# Altium PCB Plata_Perehodnaya.PcbDoc
Units mm, origin at the board's own origin, x right, y up, seen from the top; angles counter-clockwise.
Board outline 25 x 55 mm, 2 copper layers (Top Layer, Bottom Layer); 13 components, 42 nets, 103 pads, 44 vias.
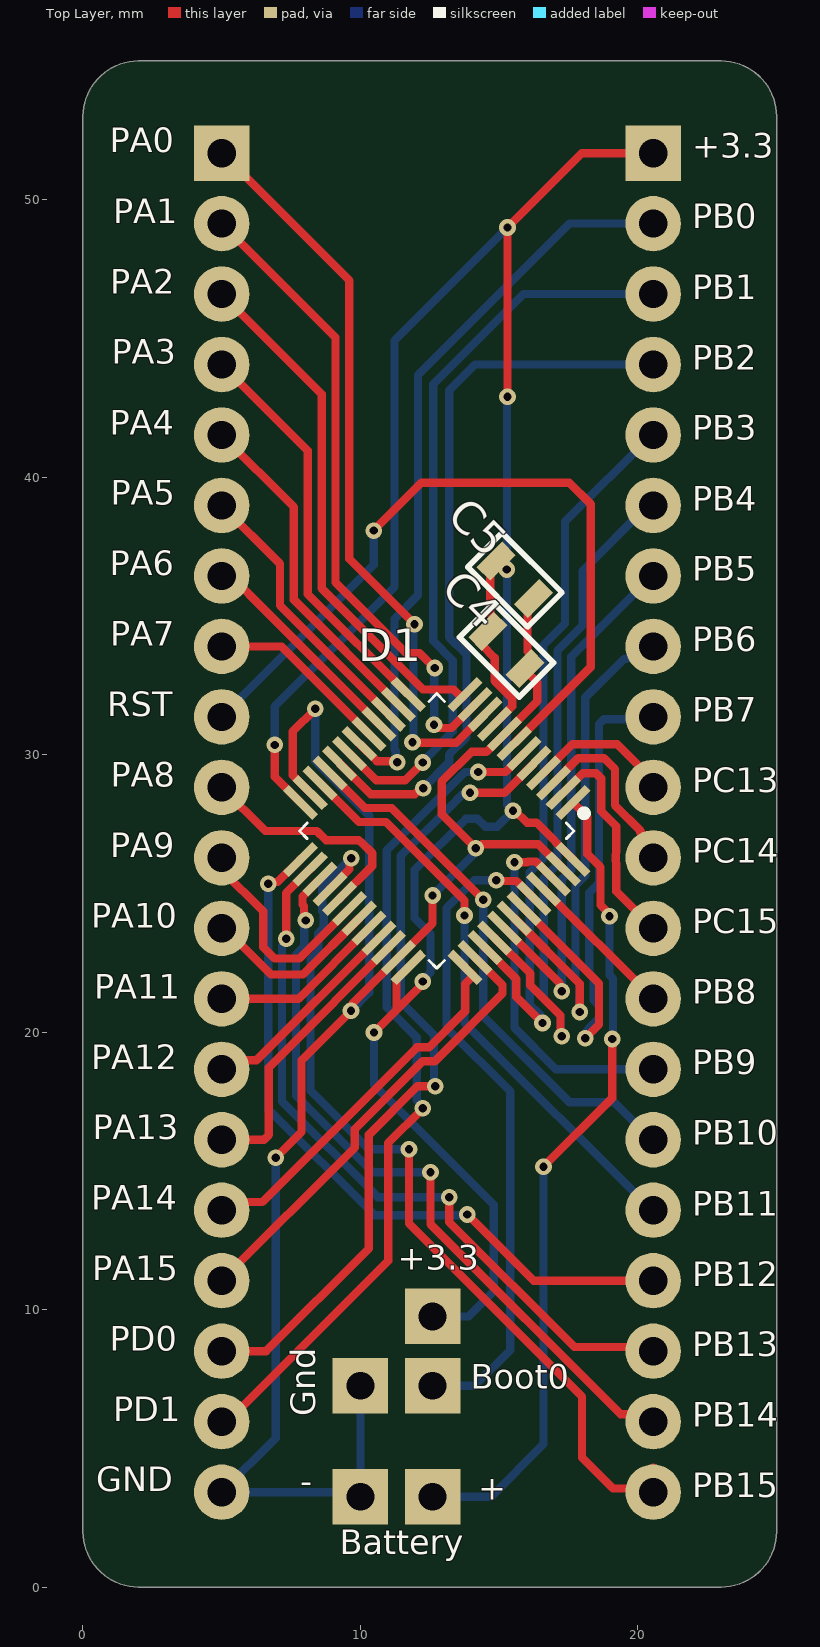
[diagram p0: Top Layer view]
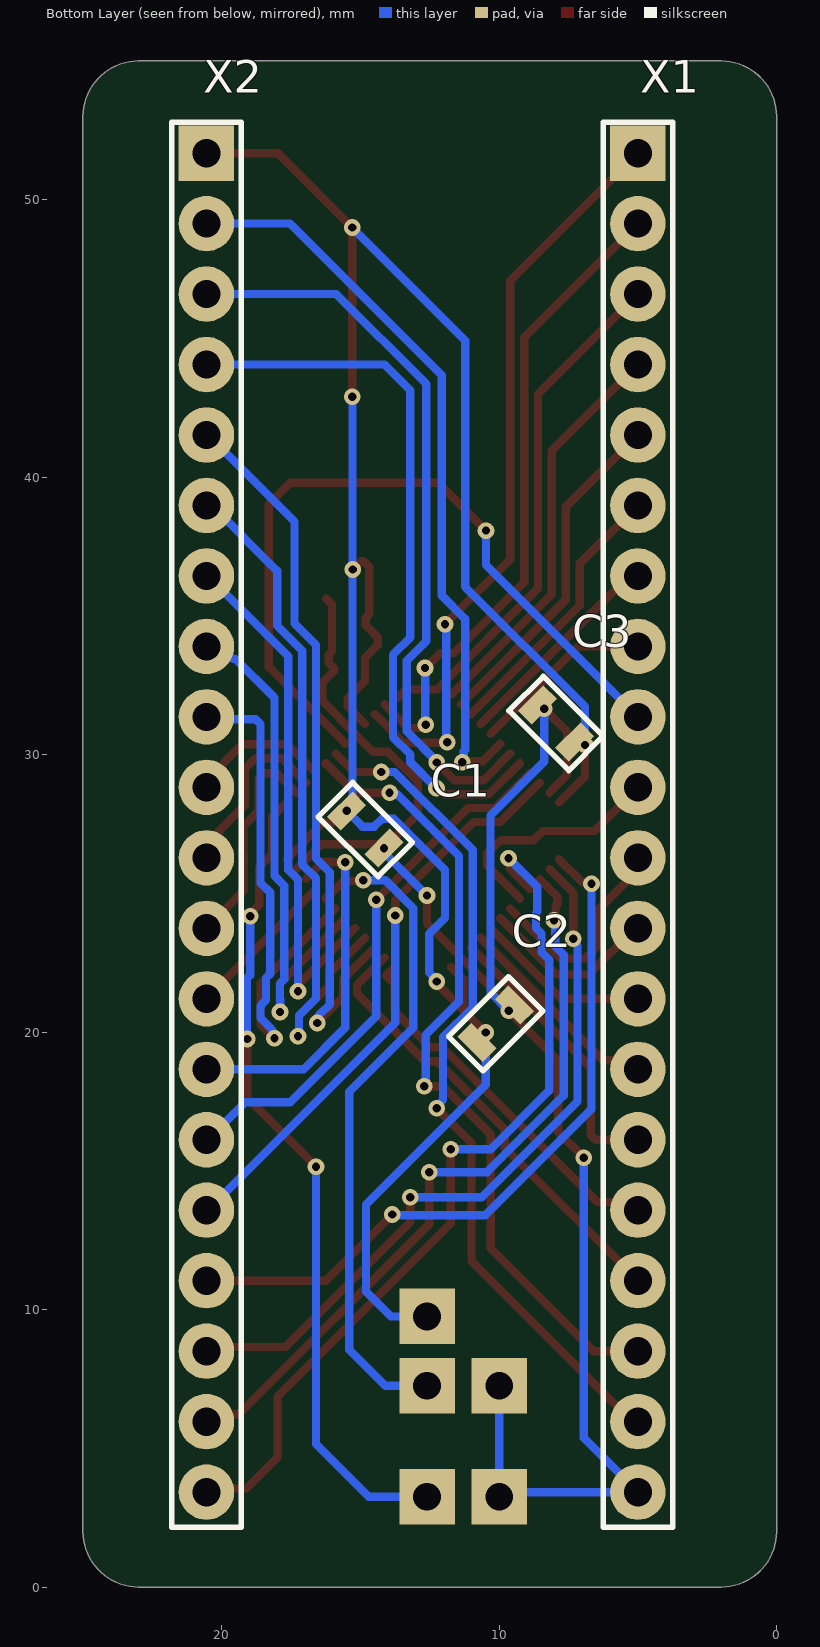
[diagram p1: Bottom Layer view, seen from below]

## Layer stack, top to bottom
Top Solder: solder mask 0.0102, Solder Resist, Dk 3.5
Top Layer: signal copper 0.0356
Dielectric 1: dielectric 0.32, FR-4, Dk 4.8
Bottom Layer: signal copper 0.0356
Bottom Solder: solder mask 0.0102, Solder Resist, Dk 3.5

## Board outline
0,2 0,53 cw(c2,53) 2,55 23,55 cw(c23,53) 25,53 25,2 cw(c23,2) 23,0 2,0 cw(c2,2)

## Design rules (kind name [scope] priority, off if disabled: settings)
Clearance [All] p1: gap=0.2 ignorepadtopadclearanceinfootprint=FALSE except(0: Arc-Hole Track-Hole SMDPad-Hole THPad-Hole Via-Hole Fill-Hole Poly-Hole Region-Hole Text-Hole)
PolygonConnect [All] p1: connectstyle=Relief reliefconductorwidth=0.254 reliefentries=4 polygonreliefangle="90 Angle" airgapwidth=0.254
RoutingVias [All] p1: holewidth=0.3 width=0.6 viastyle="Through Hole" minholewidth=0.3 minwidth=0.6 maxholewidth=1 maxwidth=2
SolderMaskExpansion [All] p1: expansion=0.102 istentingtop=FALSE
Width [All] p1: maxlimit=1 minlimit=0.3 preferedwidth=0.5
30 further rules are at their usual default settings.

## Classes and differential pairs
component class Plata_Perehodnaya: + Boot0 C1 C2 C3 C4 C5 D1 Gnd S X1 X2

## Components (designator, comment, footprint, x,y, rotation, side; value= is the part's Value field where it differs from the comment)
+ "Стыковка" Стыковка#1 13.056,2.65 r0 top (schematic designator X5)
+3.3 "Стыковка" Стыковка#2 12.6,9.665 r0 top (schematic designator X7)
- "Стыковка" Стыковка#3 9.5,2.65 r0 top (schematic designator X6)
Boot0 "Стыковка" Стыковка#4 12.6,7.207 r0 top (schematic designator X8)
C1 "0,1 мкФ" C0805 14.825,27.3 r225 bottom
C2 "0,1 мкФ" C0805 10.125,20.3 r135 bottom
C3 "0,1 мкФ" C0805 7.95,31.125 r45 bottom
C4 "0,1 мкФ" C0805 15.263,33.771 r315 top
C5 "10 нФ" C0805 15.563,36.3 r315 top
D1 "STM32F103C8" "48-LQFP (7x7)" 12.75,27.25 r225 top
Gnd "Стыковка" Стыковка#5 10.1,7.15 r0 top (schematic designator X9)
X1 "" "PLS-20 (DS-1021-1x20)" 5,40.25 r180 bottom
X2 "" "PLS-20 (DS-1021-1x20)" 20.55,40.25 r180 bottom

## Footprints (in the part's own frame and the unit in brackets; to place one, negate y for a bottom-side part, rotate by r counter-clockwise, add the part's x,y. Pads: shape width x height; smd on the part's side, far side on the other; paste and mask are expansions set on the pad)
"48-LQFP (7x7)" [mm] "TSQFP, 48-Leads, Body 7,00x7,00mm, Pitch 0,50mm, Thermal Pad 5,50x5,50mm, IPC Medium Density"
  rect 1.5x0.3 smd: 1(-4.2,2.75) 2(-4.2,2.25) 3(-4.2,1.75) 4(-4.2,1.25) 5(-4.2,0.75) 6(-4.2,0.25) 7(-4.2,-0.25) 8(-4.2,-0.75) 9(-4.2,-1.25) 10(-4.2,-1.75) 11(-4.2,-2.25) 12(-4.2,-2.75) 25(4.2,-2.75) 26(4.2,-2.25) 27(4.2,-1.75) 28(4.2,-1.25) 29(4.2,-0.75) 30(4.2,-0.25) 31(4.2,0.25) 32(4.2,0.75) 33(4.2,1.25) 34(4.2,1.75) 35(4.2,2.25) 36(4.2,2.75)
  rect 0.3x1.5 smd: 13(-2.75,-4.2) 14(-2.25,-4.2) 15(-1.75,-4.2) 16(-1.25,-4.2) 17(-0.75,-4.2) 18(-0.25,-4.2) 19(0.25,-4.2) 20(0.75,-4.2) 21(1.25,-4.2) 22(1.75,-4.2) 23(2.25,-4.2) 24(2.75,-4.2) 37(2.75,4.2) 38(2.25,4.2) 39(1.75,4.2) 40(1.25,4.2) 41(0.75,4.2) 42(0.25,4.2) 43(-0.25,4.2) 44(-0.75,4.2) 45(-1.25,4.2) 46(-1.75,4.2) 47(-2.25,4.2) 48(-2.75,4.2)
  silkscreen extent -4.32,-3.5 3.5,3.5, body extent -4.5,-4.5 4.5,4.5, height 1.6
C0805 [mm]
  rect 0.7x1.3 smd: 1(-0.95,0) 2(0.95,0)
  silkscreen extent -1.53,-0.87 1.53,0.87, body extent -1,-0.63 1,0.63, height 0.6
"PLS-20 (DS-1021-1x20)" [mm]
  rect 2x2 hole 1.02: 1(0,11.43)
  round 2 hole 1.02: 2(0,8.89) 3(0,6.35) 4(0,3.81) 5(0,1.27) 6(0,-1.27) 7(0,-3.81) 8(0,-6.35) 9(0,-8.89) 10(0,-11.43) 11(0,-13.97) 12(0,-16.51) 13(0,-19.05) 14(0,-21.59) 15(0,-24.13) 16(0,-26.67) 17(0,-29.21) 18(0,-31.75) 19(0,-34.29) 20(0,-36.83)
  silkscreen extent -1.25,-38.1 1.25,12.53, body extent -1.27,-38.1 1.27,12.7, height 9.2
Стыковка#1 [mm]
  rect 2x2 hole 1: 1(-0.456,0.6)
Стыковка#2 [mm]
  rect 2x2 hole 1: 1(0,0.085)
Стыковка#3 [mm]
  rect 2x2 hole 1: 1(0.5,0.6)
Стыковка#4 [mm]
  rect 2x2 hole 1: 1(0,0.043)
Стыковка#5 [mm]
  rect 2x2 hole 1: 1(-0.1,0.1)

## Part data
C1 C2 C3 C4: library part Capacity, "0.1 µF ±10% 50V Ceramic Capacitor X7R 0805 (2012 Metric)", Case=0805, Manufacture="Murata Electronics", Model=GRM21BR71H104KA01L, Name=Конденсатор
  C1 C2 C3: HelpURL=https://www.digikey.com/en/products/detail/murata-electronics/GRM21BR71H104KA01L/586718?s=N4IgTCBcDaIOICUCyYCMAhBB2VAJVADACwDSAggagDYgC6AvkA
  C4: HelpURL=N4IgTCBcDaIOICUCyYCMAhBB2VAJVADACwDSAggagDYgC6AvkA
C5: library part Capacity, "±5% 50V Ceramic Capacitor X7R 0805 (2012 Metric)", Case=0805, Manufacture=Yageo, HelpURL=https://www.digikey.com/en/products/detail/yageo/CS0805JRX7R9BB103/6097936, Model=CS0805JRX7R9BB103, Name=Конденсатор
D1: library part STM32F103C8T6, Case=48-LQFP, Manufacture=STMicroelectronics, HelpURL=https://www.digikey.com/product-detail/en/stmicroelectronics/STM32F103C8T7TR/STM32F103C8T7TR-ND/5268214, Model=STM32F103C8T, Name=Микроконтроллер
X1 X2: library part "Разъемы на плате-20", Name=Разъем

## Via types
v1: diameter 0.6, hole 0.3, Top Layer to Bottom Layer, 44 vias

## Nets (pads, with @x,y where several pads share a name; then routed paths per layer and width w, separated by ;. In a path a pad name is that pad's centre, name@x,y a point inside that pad or via, vN(x,y) a via of type N, cw(c..) or ccw(c..) an arc to the next point about the centre after c; other vN are vias at no path point)
+3.3: +3.3.1 C1.1 C2.1 C3.1 C4.1 C5.1 D1.9 D1.24 D1.36 D1.48 X2.1 | length 89.4
  Top Layer w0.3: v1(6.906,30.35) 6.906,29.205 D1.24 ; v1(10.488,19.987) 11.3,20.8 ; D1.36 11.3,21.911 11.3,20.8 ; v1(12.25,21.825) 12.25,21.749 11.3,20.8 ; D1.9 15.469,31.737 15.469,32.027 14.836,32.659 14.836,33.491 14.379,33.947 14.379,34.23 C4.1 14.804,34.655 14.804,34.937 14.679,35.062 14.679,36.76 C5.1 14.978,36.972 v1(15.275,36.675) ; v1(15.3,42.9) v1(15.3,49) 17.98,51.68 X2.1 ; v1(15.497,27.972) 15.578,27.972 16.004,27.546 16.343,27.546 D1.48
  Bottom Layer w0.3: v1(6.906,30.35) 6.906,31.731 11.225,36.05 11.225,44.925 v1(15.3,49) ; v1(10.488,19.987) 10.488,19.416 10.488,18.093 12.631,15.95 14.8,13.781 14.8,10.65 13.9,9.75 +3.3.1 ; v1(12.25,21.825) 12.25,21.876 12.525,22.151 12.525,23.541 11.95,24.116 11.95,25.839 13.796,27.685 14.224,27.685 14.503,27.406 14.931,27.406 v1(15.497,27.972) 15.285,28.184 15.285,42.885 v1(15.3,42.9)
BOOT0: Boot0.1 D1.44 | length 24.1
  Top Layer w0.3: v1(14.9,25.475) 14.932,25.443 15.617,25.443 D1.44
  Bottom Layer w0.3: Boot0.1 14.1,7.25 15.4,8.55 15.4,17.853 13.1,20.153 13.1,24.469 14.106,25.475 v1(14.9,25.475)
GND: -.1 C1.2 C2.2 C3.2 C4.2 C5.2 D1.8 D1.23 D1.35 D1.47 Gnd.1 X1.20 | length 66.9
  Top Layer w0.3: v1(6.95,15.475) 7.875,16.4 7.875,18.981 v1(9.66,20.765) 9.717,20.823 9.717,21.035 D1.35 12.6,23.918 v1(12.6,24.925) ; D1.23 7.556,29.262 7.556,30.831 v1(8.375,31.65) ; C5.2 16.023,35.416 16.023,33.718 16.147,33.594 16.147,33.311 C4.2 15.935,33.04 16.375,32.6 16.375,31.936 D1.8 14.539,30.1 14,30.1 12.925,29.025 12.925,27.856 v1(14.153,26.628) 14.234,26.628 14.381,26.775 16.407,26.775 D1.47
  Bottom Layer w0.3: v1(6.95,15.475) 6.95,5.37 X1.20 9.83,3.42 -.1 Gnd.1 ; v1(8.375,31.65) 8.375,29.753 10.316,27.812 10.316,21.422 v1(9.66,20.765) ; v1(12.6,24.925) 14.153,26.478 v1(14.153,26.628)
NetD1_2: D1.2 X2.12 | length 7.9
  Top Layer w0.3: D1.2 18.007,29.325 18.499,29.325 18.587,29.237 18.675,29.149 18.675,27.968 19.225,27.418 19.225,26.539 ccw(c20.55,26.28) 19.225,26.021 19.225,25.065 X2.12
NetD1_3: D1.3 X2.11 | length 6.5
  Top Layer w0.3: D1.3 17.85,29.875 18.775,29.875 19.175,29.475 19.175,28.175 20.085,27.265 20.085,27.205 20.5,26.79 X2.11@20.5,26.28
NetD1_4: D1.4 X2.10 | length 5.1
  Top Layer w0.3: D1.4 17.643,30.375 19.25,30.375 20.5,29.125 X2.10@20.5,28.82
NetD1_5: D1.5 X1.18 | length 29.1
  Top Layer w0.3: X1.18 6.6,8.5 10.3,12.2 10.3,16.3 12.05,18.05 v1(12.7,18.05) ; v1(13.95,28.625) 15.186,28.625 D1.5
  Bottom Layer w0.3: v1(12.7,18.05) 12.65,18.1 12.65,19.896 11.45,21.096 11.45,26.349 13.202,28.1 13.669,28.568 13.893,28.568 v1(13.95,28.625)
NetD1_6: D1.6 X1.19 | length 30.7
  Top Layer w0.3: X1.19 5.21,5.96 11,11.75 11,16 v1(12.25,17.25) ; v1(14.25,29.375) 15.229,29.375 D1.6
  Bottom Layer w0.3: v1(12.25,17.25) 12.25,17.331 12.025,17.556 12.025,19.814 10.95,20.889 10.95,26.556 13.769,29.375 v1(14.25,29.375)
NetD1_7: D1.7 X1.9 | length 27.6
  Top Layer w0.3: v1(10.475,38.075) 12.2,39.8 17.525,39.8 18.3,39.025 18.3,33.154 D1.7
  Bottom Layer w0.3: X1.9 10.475,36.835 v1(10.475,38.075)
NetD1_10: D1.10 X1.1 | length 27.2
  Top Layer w0.3: X1.1 5.85,50.83 9.6,47.08 9.6,37.05 v1(11.95,34.7) ; v1(11.875,30.45) 11.9,30.425 13.45,30.425 D1.10
  Bottom Layer w0.3: v1(11.875,30.45) 11.913,30.488 11.913,34.663 v1(11.95,34.7)
NetD1_11: D1.11 X1.2 | length 23.4
  Top Layer w0.3: X1.2 9.1,45.04 9.1,36.203 11.653,33.65 12.14,33.65 12.665,33.125 v1(12.675,33.125) ; v1(12.65,31.075) 12.731,31.075 12.844,30.962 13.28,30.962 D1.11
  Bottom Layer w0.3: v1(12.65,31.075) 12.663,31.088 12.663,33.112 v1(12.675,33.125)
NetD1_12: D1.12 X1.3 | length 19
  Top Layer w0.3: X1.3 8.6,43 8.6,35.996 12.246,32.35 13.361,32.35 13.661,32.05 D1.12
NetD1_13: D1.13 X1.4 | length 14.7
  Top Layer w0.3: X1.4 8.1,40.96 8.1,35.789 D1.13
NetD1_14: D1.14 X1.5 | length 12.3
  Top Layer w0.3: X1.5 7.6,38.92 7.6,35.582 D1.14
NetD1_15: D1.15 X1.6 | length 10
  Top Layer w0.3: X1.6 7.1,36.88 7.1,35.375 D1.15
NetD1_16: D1.16 X1.7 | length 7.9
  Top Layer w0.3: X1.7 5.328,36.44 6.6,35.168 D1.16
NetD1_17: D1.17 X1.8 | length 6.6
  Top Layer w0.3: X1.8 7.161,33.9 D1.17
NetD1_18: D1.18 X2.2 | length 26.7
  Top Layer w0.3: D1.18 10.59,29.764 11.286,29.764 v1(11.325,29.725)
  Bottom Layer w0.3: v1(11.325,29.725) 11.273,29.777 11.273,30.133 11.225,30.181 11.225,34.894 12.075,35.744 12.075,43.675 17.54,49.14 X2.2@20.5,49.14
NetD1_19: D1.19 X2.3 | length 26.9
  Top Layer w0.3: D1.19 10.571,29.075 11.61,29.075 v1(12.25,29.715)
  Bottom Layer w0.3: v1(12.25,29.715) 12.25,29.756 13.325,30.831 13.325,33.394 12.625,34.095 12.625,43.35 15.875,46.6 X2.3@20.5,46.6
NetD1_20: D1.20 X2.4 | length 26.5
  Top Layer w0.3: D1.20 10.364,28.575 11.969,28.575 12.178,28.785 v1(12.26,28.785)
  Bottom Layer w0.3: v1(12.26,28.785) 13.2,29.725 13.2,29.999 13.825,30.624 13.825,33.601 13.2,34.227 13.2,43.125 14.135,44.06 X2.4@20.5,44.06
NetD1_21: D1.21 X2.15 | length 19.5
  Top Layer w0.3: D1.21 10.157,28.075 11.125,28.075 v1(14.425,24.775)
  Bottom Layer w0.3: v1(14.425,24.775) 14.425,20.575 17.525,17.475 19.145,17.475 X2.15@20.5,16.12
NetD1_22: D1.22 X2.16 | length 20.9
  Top Layer w0.3: D1.22 9.775,27.75 9.95,27.575 10.918,27.575 13.75,24.743 v1(13.75,24.2)
  Bottom Layer w0.3: v1(13.75,24.2) 13.75,20.33 X2.16@20.5,13.58
NetD1_25: D1.25 X2.17 | length 26.1
  Top Layer w0.3: v1(6.675,25.35) 6.732,25.407 7.018,25.407 D1.25 ; v1(13.85,13.425) 16.235,11.04 X2.17
  Bottom Layer w0.3: v1(6.675,25.35) 6.675,17.225 10.5,13.4 13.825,13.4 v1(13.85,13.425)
NetD1_26: D1.26 X2.18 | length 26.4
  Top Layer w0.3: v1(7.325,23.363) 7.325,25.007 D1.26 ; v1(13.2,14.05) 13.2,13.156 17.707,8.649 20.401,8.649 X2.18
  Bottom Layer w0.3: v1(7.325,23.363) 7.325,23.281 7.175,23.131 7.175,17.5 10.625,14.05 v1(13.2,14.05)
NetD1_27: D1.27 X2.19 | length 27.1
  Top Layer w0.3: v1(8.025,24.025) 7.968,24.082 7.968,24.537 7.91,24.595 7.91,24.885 D1.27 ; v1(12.525,14.95) 12.525,13.075 19.37,6.23 20.28,6.23 X2.19
  Bottom Layer w0.3: v1(8.025,24.025) 7.975,23.975 7.975,23.093 7.675,22.793 7.675,17.707 10.432,14.95 v1(12.525,14.95)
NetD1_28: D1.28 X2.20 | length 32.5
  Top Layer w0.3: D1.28 9.608,25.876 9.608,26.208 v1(9.666,26.266) ; v1(11.75,15.775) 11.75,13.1 17.988,6.863 17.988,4.663 19.1,3.55 20.42,3.55 X2.20 X2.20@20.55,4.3
  Bottom Layer w0.3: v1(9.666,26.266) 8.625,25.225 8.625,24.344 8.675,24.294 8.675,23.756 8.475,23.556 8.475,22.886 8.2,22.611 8.2,17.889 10.314,15.775 v1(11.75,15.775)
NetD1_29: D1.29 X1.10 | length 8.5
  Top Layer w0.3: X1.10 6.57,27.25 8.425,27.25 8.759,26.916 9.935,26.916 10.001,26.85 10.025,26.85 10.425,26.45 10.425,25.986 D1.29
NetD1_30: D1.30 X1.11 | length 7.9
  Top Layer w0.3: X1.11 5,25.85 6.5,24.35 6.5,23.057 6.907,22.65 7.796,22.65 D1.30
NetD1_31: D1.31 X1.12 | length 6.5
  Top Layer w0.3: X1.12 5.11,23.74 6.775,22.075 7.929,22.075 D1.31
NetD1_32: D1.32 X1.13 | length 6.4
  Top Layer w0.3: X1.13 7.761,21.2 D1.32
NetD1_33: D1.33 X1.14 | length 7.6
  Top Layer w0.3: X1.14 5.325,18.985 6.253,18.985 D1.33
NetD1_34: D1.34 X1.15 | length 10.3
  Top Layer w0.3: X1.15 6.524,16.12 6.7,16.296 6.7,18.725 7.112,19.138 D1.34
NetD1_37: D1.37 X1.16 | length 13.6
  Top Layer w0.3: X1.16 5.298,13.878 6.464,13.878 12.034,19.449 12.472,19.449 13.775,20.752 13.775,21.736 14.075,22.036 D1.37
NetD1_38: D1.38 X1.17 | length 16.5
  Top Layer w0.3: X1.17 9.8,15.84 9.8,16.507 12.242,18.949 12.679,18.949 15.121,21.39 15.121,21.697 D1.38
NetD1_39: D1.39 X2.5 | length 26.8
  Top Layer w0.3: D1.39 15.621,21.904 15.621,21.268 v1(16.562,20.327)
  Bottom Layer w0.3: v1(16.562,20.327) 16.504,20.384 16.504,20.596 16.438,20.663 16.101,21 16.101,25.757 16.6,26.256 16.6,33.954 17.375,34.729 17.375,38.395 X2.5@20.5,41.52
NetD1_40: D1.40 X2.6 | length 25.6
  Top Layer w0.3: D1.40 16.121,22.111 16.121,21.687 17.212,20.596 17.212,19.888 v1(17.25,19.85)
  Bottom Layer w0.3: v1(17.25,19.85) 17.212,19.888 17.212,20.596 16.601,21.207 16.601,25.55 17.1,26.049 17.1,33.747 18,34.647 18,36.625 20.355,38.98 X2.6@20.5,38.98
NetD1_41: D1.41 X2.7 | length 19.4
  Top Layer w0.3: D1.41 17.194,21.746 17.194,21.534 v1(17.251,21.476)
  Bottom Layer w0.3: v1(17.251,21.476) 17.251,25.493 17.6,25.842 17.6,33.54 X2.7@20.5,36.44
NetD1_42: D1.42 X2.8 | length 19.1
  Top Layer w0.3: D1.42 17.903,21.744 17.903,20.728 v1(17.9,20.725)
  Bottom Layer w0.3: v1(17.9,20.725) 17.89,20.735 17.89,21.196 17.901,21.207 17.901,21.745 17.751,21.895 17.751,25.286 18.1,25.634 18.1,32.05 19.5,33.45 19.59,33.45 20.04,33.9 X2.8@20.5,33.9
NetD1_43: D1.43 X2.9 | length 19.8
  Top Layer w0.3: D1.43 18.6,21.754 18.6,20.275 v1(18.1,19.775)
  Bottom Layer w0.3: v1(18.1,19.775) 18.157,19.832 18.157,20.033 18.225,20.101 18.225,20.131 18.6,20.506 18.6,20.95 18.401,21.149 18.401,21.952 18.251,22.102 18.251,25.026 18.6,25.375 18.6,31.099 18.776,31.275 20.415,31.275 X2.9@20.5,31.36
NetD1_45: D1.45 X2.13 | length 5.6
  Top Layer w0.3: D1.45 20.5,21.268 X2.13@20.5,21.2
NetD1_46: D1.46 X2.14 | length 13.2
  Top Layer w0.3: v1(15.55,26.125) 16.01,26.126 16.034,26.15 16.324,26.15 D1.46
  Bottom Layer w0.3: v1(15.55,26.125) 15.55,20.157 17.047,18.66 X2.14@20.5,18.66
VBAT: +.1 D1.1 | length 29.5
  Top Layer w0.3: v1@16.618,15.168 19.075,17.625 v1(19.075,19.75) ; D1.1 18.175,27.765 18.175,26.421 18.651,25.945 18.651,24.58 18.975,24.256 v1(18.975,24.175)
  Bottom Layer w0.3: +.1 14.7,3.25 16.6,5.15 v1(16.6,15.15) ; v1(18.975,24.175) 18.975,22.054 19.1,21.929 19.1,19.775 v1(19.075,19.75)

## Silkscreen, mask and mechanical layers (free items; w line width, h text height)
Top Overlay:
  text "PA0" at 0.967,51.415 h1.5
  text "+3.3" at 21.967,51.218 h1.5
  text "PA1" at 1.084,48.86 h1.5
  text "PB0" at 21.967,48.675 h1.5
  text "PA2" at 0.974,46.32 h1.5
  text "PB1" at 21.967,46.12 h1.5
  text "PA3" at 1.031,43.795 h1.5
  text "PB2" at 21.967,43.58 h1.5
  text "PA4" at 0.966,41.24 h1.5
  text "PB3" at 21.967,41.055 h1.5
  text "PA5" at 1.009,38.715 h1.5
  text "PB4" at 21.967,38.5 h1.5
  text "PA6" at 0.971,36.175 h1.5
  text "PB5" at 21.967,35.975 h1.5
  text "PA7" at 0.981,33.638 h1.5
  text "PB6" at 21.967,33.435 h1.5
  text "RST" at 0.88,31.101 h1.5
  text "PB7" at 21.967,30.898 h1.5
  text "PA8" at 0.996,28.555 h1.5
  text "PC13" at 21.967,28.361 h1.5
  text "PA9" at 0.977,26.018 h1.5
  text "PC14" at 21.967,25.821 h1.5
  text "PA10" at 0.291,23.475 h1.5
  text "PC15" at 21.967,23.281 h1.5
  text "PA11" at 0.407,20.92 h1.5
  text "PB8" at 21.967,20.735 h1.5
  text "PA12" at 0.297,18.38 h1.5
  text "PB9" at 21.967,18.198 h1.5
  text "PA13" at 0.354,15.855 h1.5
  text "PB10" at 21.967,15.655 h1.5
  text "PA14" at 0.289,13.3 h1.5
  text "PB11" at 21.967,13.1 h1.5
  text "PA15" at 0.332,10.775 h1.5
  text "PB12" at 21.967,10.56 h1.5
  text "PD0" at 0.967,8.235 h1.5
  text "PB13" at 21.967,8.035 h1.5
  text "PD1" at 1.084,5.68 h1.5
  text "PB14" at 21.967,5.48 h1.5
  text "GND" at 0.469,3.161 h1.5
  text "PB15" at 21.967,2.955 h1.5
  text "Battery" at 9.252,0.893 h1.5
Board (Mech10):
  the board outline again, w0.2